# Altium PCB PCB1.PcbDoc
Units mil, origin at the board's own origin, x right, y up, seen from the top; angles counter-clockwise.
Board outline 2755.57 x 2075 mil, 2 copper layers (Top Layer, Bottom Layer); 23 components, 20 nets, 82 pads, 6 vias.
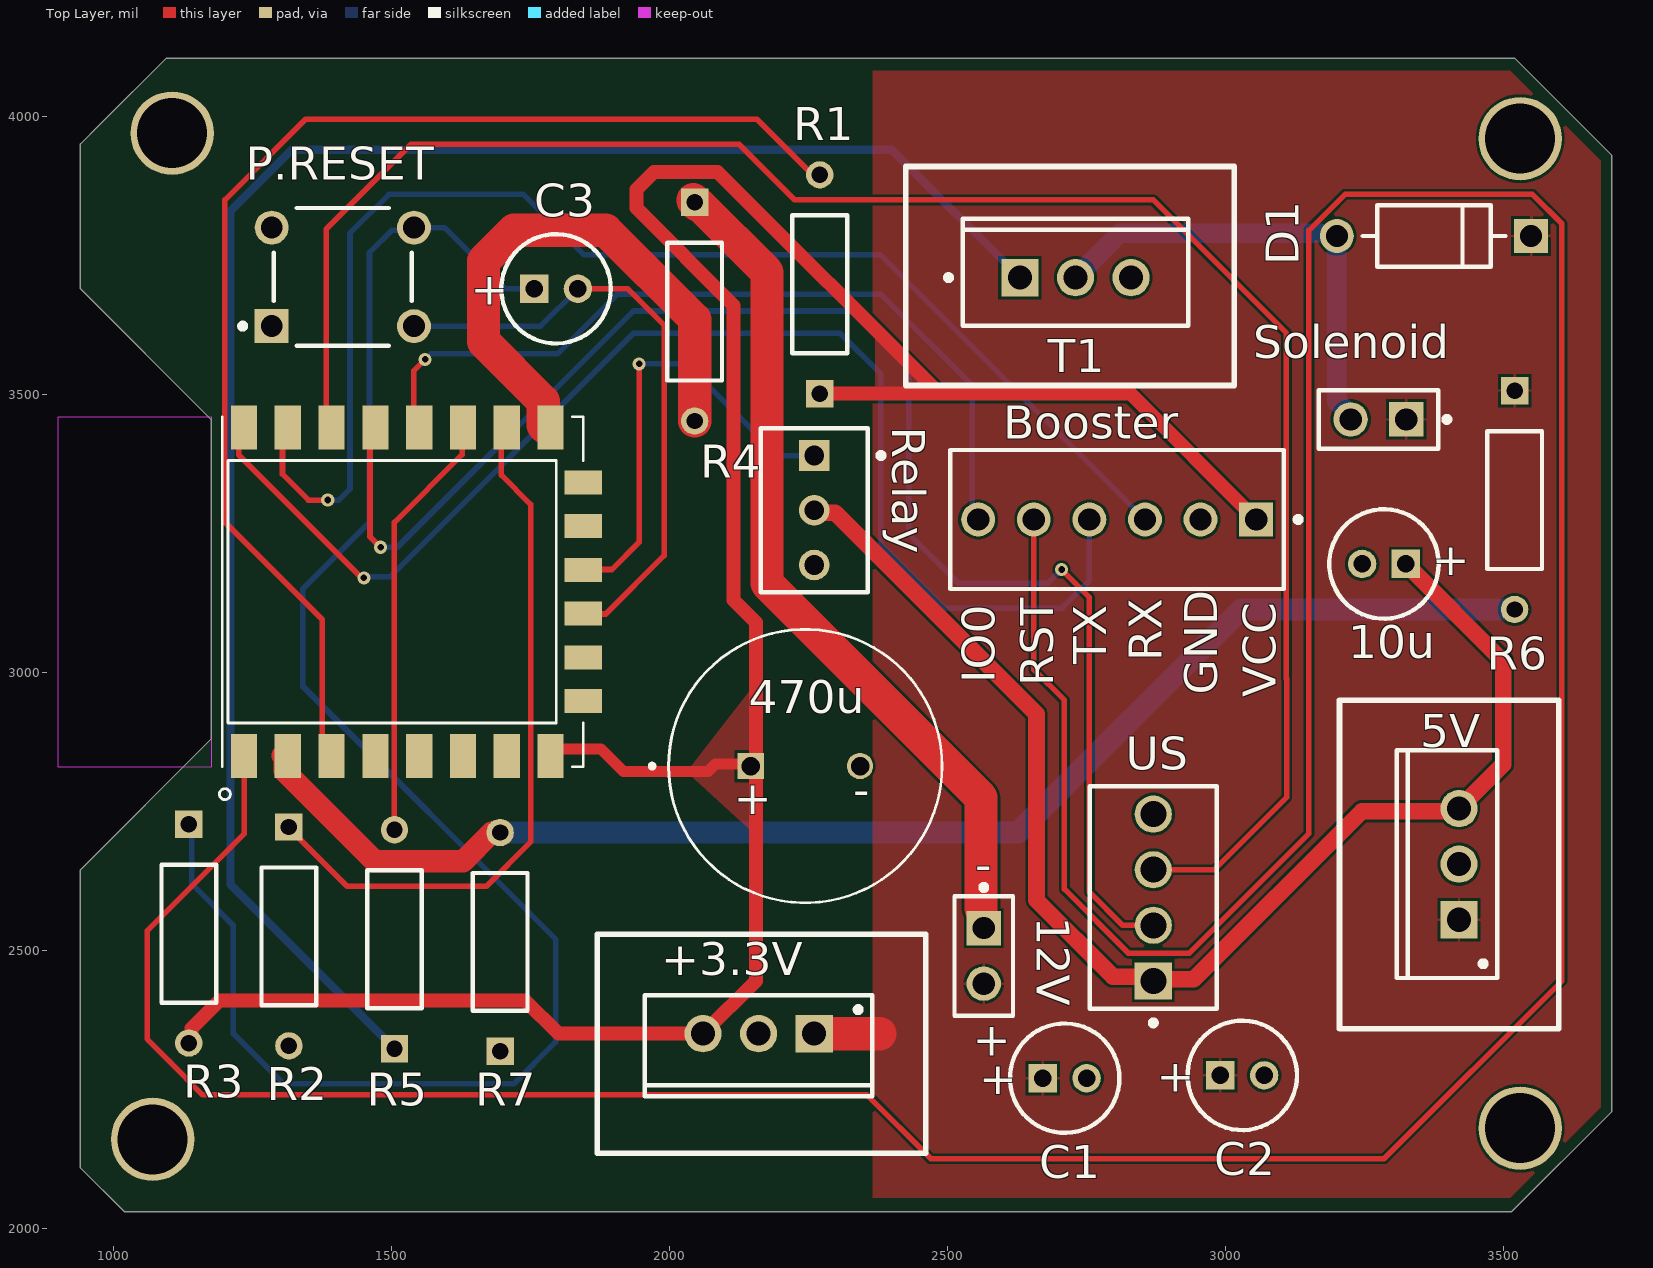
[diagram p0: Top Layer view]
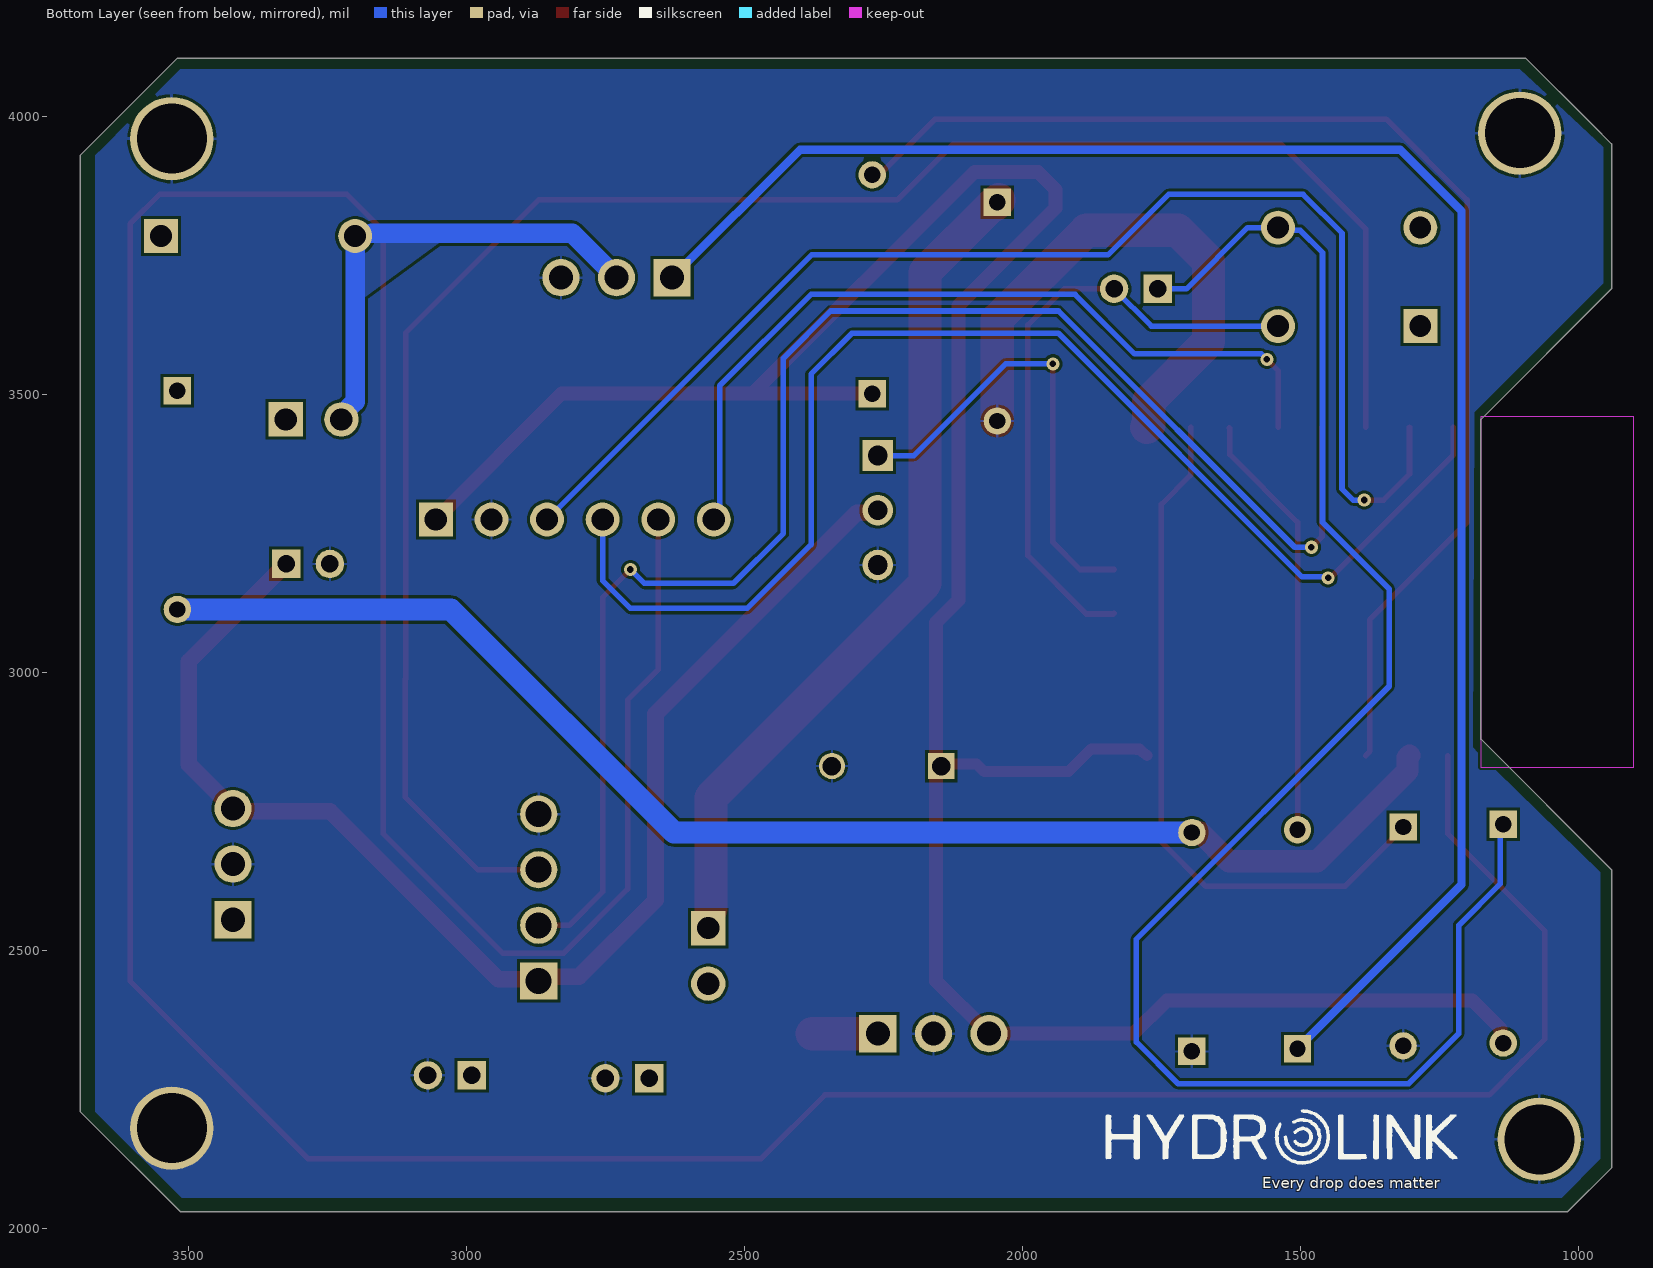
[diagram p1: Bottom Layer view, seen from below]
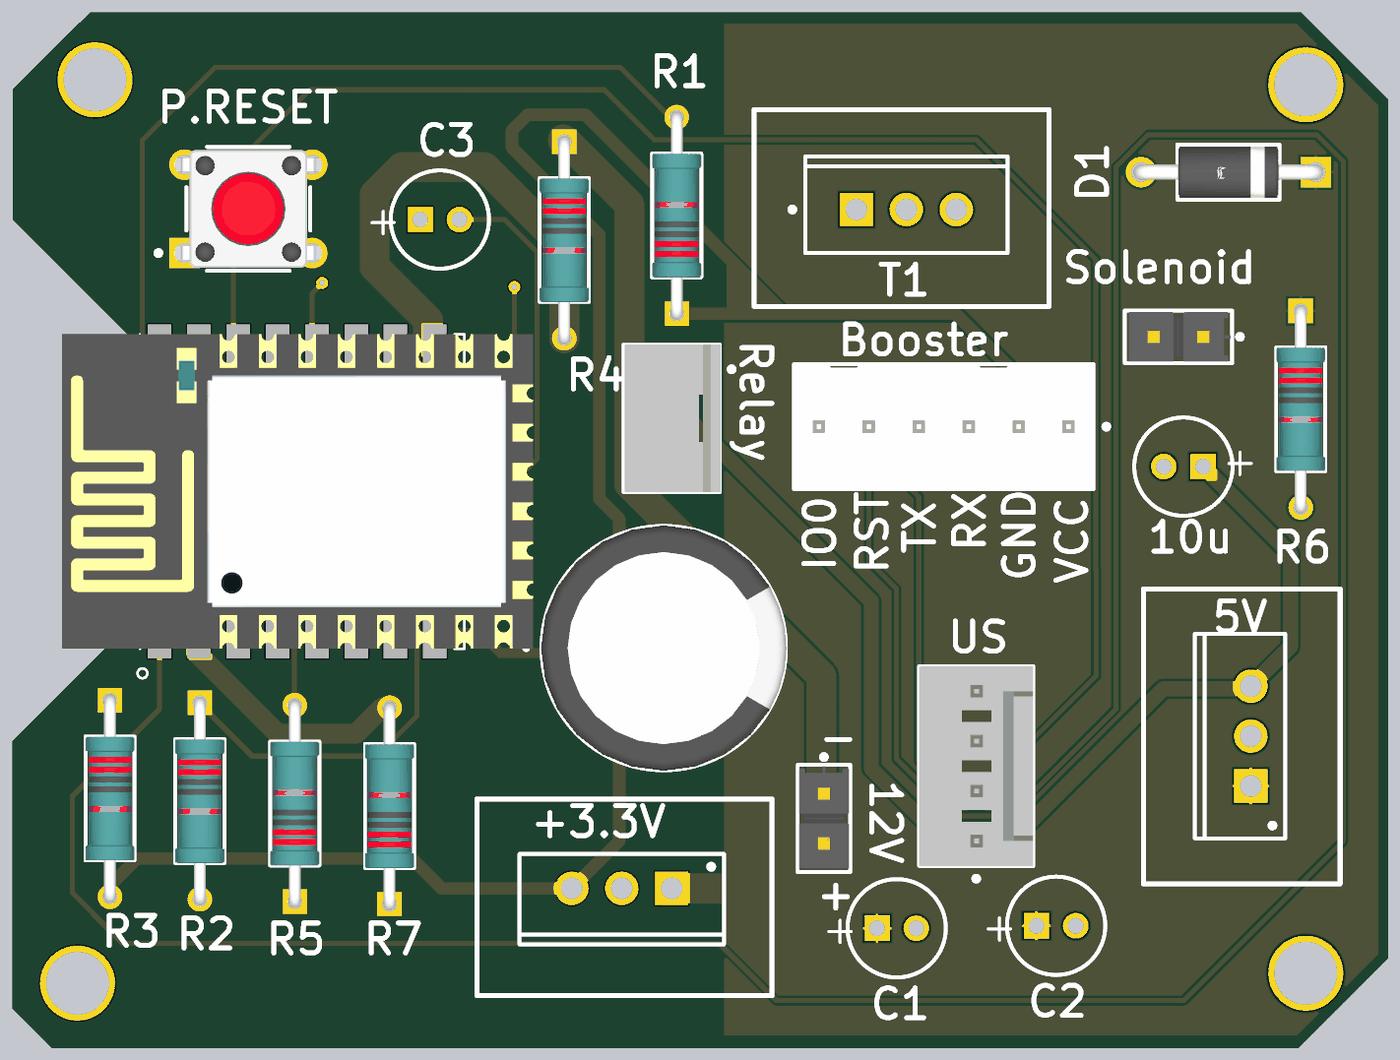
[diagram p2: 3D render of the assembled board from above, using the file's embedded part models]

## Layer stack, top to bottom
Top Solder: solder mask 0.4, Solder Resist, Dk 3.5
Top Layer: signal copper 1.4
Dielectric 1: dielectric 12.6, FR-4, Dk 4.8
Bottom Layer: signal copper 1.4
Bottom Solder: solder mask 0.4, Solder Resist, Dk 3.5

## Board outline
939.59,2645 940,2645 1175,2880 1175,3455 939.92,3690 940,3950.58 974.79,3985.38 1095,4105 3520,4105 3695,3930 3695,2210 3515,2030 1018.85,2030 939.43,2109.43

## Design rules (kind name [scope] priority, off if disabled: settings)
BoardOutlineClearance [All] p1: gap=7.87 ignorepadtopadclearanceinfootprint=FALSE
Clearance [All] p1: gap=5 ignorepadtopadclearanceinfootprint=FALSE except(9.84: Arc-Hole Track-Hole SMDPad-Hole THPad-Hole Via-Hole Fill-Hole Poly-Hole Region-Hole Text-Hole)
ComponentClearance [All] p1: gap=5 collisioncheckmode=3 verticalgap=5 showdistances=TRUE
DiffPairsRouting [All] p1: maxlimit=10 minlimit=5 mostfreqgap=5 toplayer_minwidth=5 toplayer_maxwidth=1000 toplayer_prefwidth=5 bottomlayer_minwidth=5 bottomlayer_maxwidth=1000 bottomlayer_prefwidth=5 maxuncoupledlength=500
Height [All] p1: minheight=0 maxheight=71497.94 prefheight=500
HoleSize [All] p1: absolutevalues=TRUE maxlimit=248.03 minlimit=11.81 maxpercent=80.000 minpercent=20.000
HoleToHoleClearance [All] p1: gap=9.84 allowstackedmicrovias=FALSE
MinimumAnnularRing [All] p1: minimumring=3
MinimumSolderMaskSliver [All] p1: minsoldermaskwidth=0
PlaneClearance [All] p1: clearance=5
PlaneConnect PlaneConnectPowerPads [InPadClass('PowerPads')] p1: planeconnectstyle=Direct reliefexpansion=20 reliefentries=4 reliefconductorwidth=10 reliefairgap=10
PlaneConnect [All] p2: pad.planeconnectstyle=Relief pad.reliefexpansion=11.81 pad.reliefentries=4 pad.reliefconductorwidth=5 pad.reliefairgap=5 via.planeconnectstyle=Direct via.reliefexpansion=11.81 via.reliefentries=4 via.reliefconductorwidth=5 via.reliefairgap=5
PolygonConnect PolygonConnectPowerPads [All vs (InPadClass('PowerPads'))] p1: connectstyle=Direct reliefconductorwidth=10 reliefentries=4 polygonreliefangle="90 Angle" airgapwidth=10
PolygonConnect [All] p2: thpad.connectstyle=Relief thpad.reliefconductorwidth=5 thpad.reliefentries=4 thpad.polygonreliefangle="90 Angle" thpad.airgapwidth=5 smdpad.connectstyle=Relief smdpad.reliefconductorwidth=5 smdpad.reliefentries=4 smdpad.polygonreliefangle="90 Angle" smdpad.airgapwidth=5 via.connectstyle=Direct via.reliefconductorwidth=5 via.reliefentries=4 via.polygonreliefangle="90 Angle" via.airgapwidth=5
RoutingVias [All] p1: holewidth=11.81 width=23.62 viastyle="Through Hole" minholewidth=11.81 minwidth=23.62 maxholewidth=23.62 maxwidth=259.84
SilkToSilkClearance [All] p1: silktosilkclearance=0
SilkToSolderMaskClearance [IsPad] p1: minsilkscreentomaskgap=5 clearancetoexposedcopper=TRUE
SolderMaskExpansion [All] p1: expansion=2.95 istentingtop=FALSE
Width [All] p1: maxlimit=1000 minlimit=5 preferedwidth=5 minimp=50.000000 maximp=50.000000 favimp=50.000000
20 further rules are at their usual default settings.

## Classes and differential pairs
component class "Hydro Line": 5V 10u 12V 470u +3.3V C1 C2 C3 D1 P.RESET R1 R2 R3 R4 R5 R7 Relay Solenoid T1

## Components (designator, comment, footprint, x,y, rotation, side; value= is the part's Value field where it differs from the comment)
5V "L7805CV" TO220 3420,2655 r90 top
10u "ECA1HM220" CAPPR55-200-1100X500X1200 3285,3195 r180 top
12V "TSW-102-07-L-S" FP-TSW-102-07-L-S-MFG 2565,2490 r270 top
470u "EEUTP1V471" CAPPRD500W60D1250H2000 2244.07,2831.38 r0 top
+3.3V "BA033T" TO220 2160,2350 r180 top
Booster "22-23-2061" MOLX-22-23-2061_V 2805,3275 r180 top
C1 "ECA1HM220" CAPPR55-200-1100X500X1200 2710.63,2270 r0 top
C2 "ECA1HM220" CAPPR55-200-1100X500X1200 3030,2275 r0 top
C3 "ECA1HM220" CAPPR55-200-1100X500X1200 1795.63,3690 r0 top
D1 "1N4007" FP-1N4007-MFG 3375,3785 r180 top value=15pF
P.RESET "EVQ-PAG05R" FP-EVQ-PAG05R-MFG 1412.05,3711.42 r90 top
R1 "" FP-MBB0207-MFG 2270,3698.15 r90 top
R2 "" FP-MBB0207-MFG 1315,2525 r270 top
R3 "" FP-MBB0207-MFG 1135,2530 r270 top
R4 "" FP-MBB0207-MFG 2045,3649 r270 top
R5 "" FP-MBB0207-MFG 1505,2520 r90 top
R6 "" FP-MBB0207-MFG 3520,3310 r270 top
R7 "" FP-MBB0207-MFG 1695,2515 r90 top
Relay "171825-3" TECO-171825-3_V 2260,3291.57 r270 top
Solenoid "TSW-102-07-L-S" FP-TSW-102-07-L-S-MFG 3275,3455 r180 top
T1 "TIP120" ONSC-TO-220-3-221A-09 2730,3710 r90 top
US "22-27-2041" MOLX-22-27-2041_V 2870,2595 r270 top
? "ESP8266-12E/ESP-12E" XCVR_ESP8266-12E/ESP-12E 1510,3145 r90 top

## Footprints (in the part's own frame and the unit in brackets; to place one, negate y for a bottom-side part, rotate by r counter-clockwise, add the part's x,y. Pads: shape width x height; smd on the part's side, far side on the other; paste and mask are expansions set on the pad)
CAPPR55-200-1100X500X1200 [mm] "THD, 2-Leads, Dia 5mm, Body Length 11mm"
  rect 1.3x1.3 hole 0.8: 1(-1,0)
  round 1.3 hole 0.8: 2(1,0)
  silkscreen extent -2.5,-2.5 2.5,2.5, body extent -2.5,-2.5 2.5,2.5, height 12
CAPPRD500W60D1250H2000 [mm]
  round 1.2 hole 0.85: N(2.5,0)
  rect 1.2x1.2 hole 0.85: P(-2.5,0)
  silkscreen extent -7.1,-6.25 6.25,6.25, body extent -6.25,-6.25 6.25,6.25, height 20
FP-1N4007-MFG [mm]
  rect 1.55x1.55 hole 1 paste-1000 mask+0: 1(-4.44,0)
  round 1.55 hole 1 paste-1000 mask+0: 2(4.44,0)
  silkscreen extent -3.27,-1.4 3.27,1.4, body extent -5.32,-1.5 5.32,1.5, height 0.25
FP-EVQ-PAG05R-MFG [mm]
  rect 1.55x1.55 hole 1 paste-1000 mask+0: A(-2.25,3.25)
  round 1.55 hole 1 paste-1000 mask+0: A'(-2.25,-3.25) B(2.25,3.25) B'(2.25,-3.25)
  silkscreen extent -3.15,-3.15 3.15,4.7, body extent -3.25,-4.13 3.25,4.13, height 0.25
FP-MBB0207-MFG [mm]
  rect 1.25x1.25 hole 0.75 paste-1000 mask+0: 1(-5,0)
  round 1.25 hole 0.75 paste-1000 mask+0: 2(5,0)
  silkscreen extent -3.15,-1.25 3.15,1.25, body extent -5.72,-1.35 5.72,1.35, height 0.25
FP-TSW-102-07-L-S-MFG [mm]
  rect 1.57x1.57 hole 1.02 paste-1000 mask+0: 1(-1.27,0)
  round 1.57 hole 1.02 paste-1000 mask+0: 2(1.27,0)
  silkscreen extent -3.25,-1.34 2.73,1.34, body extent -2.83,-1.44 2.83,1.44, height 0.25
MOLX-22-23-2061_V [mm] "THD, 6-Leads, Body 15.24x6.35mm, Pitch 2.54mm"
  rect 1.55x1.55 hole 1.02: 1(-6.35,0)
  round 1.55 hole 1.02: 2(-3.81,0) 3(-1.27,0) 4(1.27,0) 5(3.81,0) 6(6.35,0)
  silkscreen extent -8.4,-3.18 7.62,3.18, body extent -7.54,-3.25 7.54,3.1, height 10.67
MOLX-22-27-2041_V [mm] "CONN, 4-Leads, Body 10.16x5.8mm, Pitch 2.54mm"
  rect 1.7x1.7 hole 1.19: 1(3.81,0)
  round 1.7 hole 1.19: 2(1.27,0) 3(-1.27,0) 4(-3.81,0)
  silkscreen extent -5.08,-2.9 5.85,2.9, body extent -5.08,-2.9 5.08,2.9, height 11.7
ONSC-TO-220-3-221A-09 [mm] "FM, 3-Leads, Body 10.3x4.85mm, Pitch 2.54mm"
  rect 1.7x1.7 hole 1.1: 1(0,2.54)
  round 1.7 hole 1.1: 2(0,0) 3(0,-2.54)
  silkscreen extent -2.2,-5.15 2.69,5.92, body extent -2.18,-5.15 2.67,5.15, height 19.85
TECO-171825-3_V [mm] "Connector, 3-Leads, Body 4.9x7.5mm, Pitch 2.5mm"
  rect 1.4x1.4 hole 0.9: 1(-2.5,0)
  round 1.4 hole 0.9: 2(0,0) 3(2.5,0)
  silkscreen extent -3.75,-2.45 3.75,3.17, body extent -3.75,-2.4 3.75,2.5, height 10.4
TO220 [mm] "TO, Thru-Hole, Vertical, Heatsink Mounted; 3 In-Line Leads; Pitch 2.54 mm"
  rect 1.7x1.7 hole 1.1: 1(-2.54,0)
  round 1.7 hole 1.1: 2(0,0) 3(2.54,0)
  silkscreen extent -5.2,-1.75 5.2,2.85, body extent -5.25,-1.8 5.25,2.9, height 19.7
XCVR_ESP8266-12E/ESP-12E [mm]
  rect 2x1.2 smd: 1(-7.5,7) 2(-7.5,5) 3(-7.5,3) 4(-7.5,1) 5(-7.5,-1) 6(-7.5,-3) 7(-7.5,-5) 8(-7.5,-7) 15(7.5,-7) 16(7.5,-5) 17(7.5,-3) 18(7.5,-1) 19(7.5,1) 20(7.5,3) 21(7.5,5) 22(7.5,7)
  rect 1.1x1.7 smd: 9(-5,-8.5) 10(-3,-8.5) 11(-1,-8.5) 12(1,-8.5) 13(3,-8.5) 14(5,-8.5)
  Keep-Out Layer region: 8,8.51 -8.009,8.51 -8.009,15.5 8,15.5
  Keep-Out Layer region: 8,8.51 -8.009,8.51 -8.009,15.5 8,15.5
  silkscreen extent -9.5,-8.5 8,8.12, body extent -8,-12 8,12, height 3

## Part data
5V +3.3V: library part CMP-0244-00483-1, "Positive Voltage Regulator, 5V, 3-Pin TO-220", ComponentLink1Description="Manufacturer URL", ComponentLink1URL=http://www.st.com, ComponentLink2Description=Datasheet, ComponentLink2URL=http://www.st.com/internet/com/TECHNICAL_RESOURCES/TECHNICAL_LITERATURE/DATASHEET/CD00000444.pdf, ComponentLink3Description="Package Specification", ComponentLink3URL=http://www.st.com/internet/com/TECHNICAL_RESOURCES/TECHNICAL_LITERATURE/PACKAGE_INFORMATION/CD00004649.pdf, DatasheetVersion=16/11/2011, PackageDescription="TO, Thru-Hole, Vertical, Heatsink Mounted; 3 In-Line Leads; Pitch 2.54 mm", PackageReference=TO220, PackageVersion=ver3.0
10u C1 C2 C3: library part CMP-1665-00036-2, "Aluminum Electrolytic Capacitor, 22 uF, +/- 20%, 50 V, -40 to 85 degC, 2-Pin THD, RoHS, Bulk", Capacitance=22uF, Case/Package=Radial, Leakage Current=3uA, Manufacturer=Panasonic, Max Operating Temperature=85degC, Min Operating Temperature=-40degC, Package Description="2-Pin Radial Lead, Dia 5 mm, Height 12 mm", Package Quantity=200, Package Reference=CAPPR55-200-1100X500X1200, Ripple Current=100mA, Tolerance=20%, Voltage=50V, Datasheet URL=https://industrial.panasonic.com/cdbs/www-data/pdf/RDF0000/ABA0000C1218.pdf, Datasheet Version="Rev. 05, 10/2016", Diameter=5mm, Dissipation Factor=0.12%, Height=11mm, Height - Seated (Max)=0.472inch, Lead Diameter=0.5mm, Lead Pitch=2mm, Lead/Base Style=Straight, Length=11mm, Life (Hours)=2000Hour, Manufacturer URL=http://www.panasonic.com/, Mount=ThroughHole, Packaging=Bulk, Radiation Hardening=No, REACH SVHC=NoSVHC, Ripple Current (AC)=100mA, RoHSCompliant=true, Termination=Radial, Voltage Rating=50V, Voltage Rating (DC)=50V
12V Solenoid: library part CMP-02766-001428-1, "CONN HEADER VERT 2POS 2.54MM", Color=Black, Current Rating=7.6A, Max Operating Temperature=125°C, Max Voltage Rating (AC)=550V, Min Operating Temperature=-55°C, Package Quantity=1, Connector Type="Male Pin", Contact Material=Bronze, Contact Mating Length=0.23inch, Contact Plating=Gold, Contact Type="Male Pin", Depth=2.54mm, Gender=Male, Housing Color=Black, Housing Material=Polyester, Lead Free="Lead Free", Length=5.08mm, Max Current Rating=7.6A, Mount="Through Hole", Number of Contacts=2, Number of Positions=2, Number of Rows=1, Orientation=Straight, Packaging=Bulk, Pitch=2.54mm, Radiation Hardening=No, REACH SVHC="No SVHC", RoHS Compliant=Yes, Series=TSW, Termination=Solder, Voltage Rating=550V, Width=2.54mm
470u: "CAP ALUM 470UF 20% 35V RADIAL", Package="RADIAL-2 Panasonic", Availability="In Stock", Check_prices=https://www.snapeda.com/parts/EEU-TP1V471/Panasonic/view-part/2304886/?ref=eda, MF=Panasonic, MP=EEU-TP1V471, Price=None, SnapEDA_Link=https://www.snapeda.com/parts/EEU-TP1V471/Panasonic/view-part/2304886/?ref=snap
Booster: library part CMP-2000-05536-1, "Male Header, Pitch 2.54 mm, 1 x 6 Position, Height 10.67 mm, Tail Length 3.56 mm, 0 to 70 degC, RoHS, Bulk", Current Rating=4A, Manufacturer=Molex, Package Description="Male Header, Pitch 2.54 mm, 1 x 6 Position, Height 10.67 mm, Tail Length 3.56 mm", Voltage Rating=250V, Brand=Molex, Contact Material=Brass, Contact Plating=Tin, Datasheet URL=https://datasheet.ciiva.com/19460/232303-19460895.pdf, Datasheet Version="Rev. P, 09/2001", Factory Pack Quantity=1000, Housing Material=Nylon, Manufacturer URL=http://www.molex.com/, Mounting Angle=Vertical, Mounting Style=ThroughHole, Mounting Technology=ThroughHole, Number of Positions=6, Number of Positions / Contacts=6, Number of Rows=1, Package Reference=22-23-2061, Packaging=Bulk, Pitch=2.54mm, Product Category=.100K.K.Connectors, Product Type=Headers, RoHS=Details, Series=6373, Termination Style=ThroughHole, Tradename=KK, Type=PinStrip
D1: library part CMP-123542-000001-1, "Rectifier diode 1000 V 1 A DO-41, ,", Capacitance=15pF, Forward Current=1A, Manufacturer=Diotec, Max Junction Temp=+175°C, Max Repetitive Reverse Voltage=1000V, Max Surge Forward Current=27A, Peak Reverse Current=5uA, Temperature="-50°C to +175°C", Temperature Range Low=-50°C, Automotive=No, Category=Diode, ComponentLink2Description=Datasheet, ComponentLink2URL=https://datasheet.octopart.com/1N4007-Diotec-datasheet-62346875.pdf, Device Class L1="Discrete Semiconductors", Device Class L2=Diodes, Device Class L3="Rectifier Diodes", Height=2.8mm, Ipc Land Pattern Name=DIOAD888W100L520D280, Lead Free=Yes, Manufacturer Part Number=1N4007, Octopart=https://octopart.com/1n4007-diotec-4040411, Package=1N4007, Reverse Voltage=1000V, RoHS=TRUE, Temperature Range High=+175°C
P.RESET: library part CMP-05618-000039-1, "SWITCH TACTILE SPST-NO 0.02A 15V", Actuator Color=Red, Contact Current Rating=20mA, Contact Resistance=50mR, Max Operating Temperature=70°C, Max Voltage Rating (DC)=15V, Min Operating Temperature=-20°C, Operating Force=2.6N, Package Quantity=500, Actuator Length=1.6mm, Actuator Type=Standard, Contact Plating=Silver, Current Rating=20mA, Depth=6.5mm, Electrical Life=50000Cycles, Height=5mm, Illumination Type=Non-Illuminated, Lead Free="Lead Free", Length=6mm, Max Current Rating=20mA, Mechanical Life=50000Cycles, Mount="Through Hole", Orientation=Straight, Packaging=Bulk, Radiation Hardening=No, REACH SVHC="No SVHC", RoHS Compliant=Yes, Series=EVQPA, Size=6mm, Switch Function=Off-Mom, Switch Travel=0.25mm, Termination="PC Pin", Throw Configuration=SPST, Voltage Rating (DC)=15V, Width=6mm
R1 R2 R3 R4 R5 R6 R7: library part CMP-02408-000035-1, "RES 10K OHM 0.6W 1% AXIAL", Case/Package=Conformal, Max Operating Temperature=155°C, Max Power Dissipation=600mW, Min Operating Temperature=-55°C, Resistance=10kR, Resistance Tolerance=1%, Resistor Type="Metal Film", Temperature Coefficient=50ppm/°C, Voltage Rating=300V, Construction=Cylindrical, Contact Plating=Tin, Diameter=2.5mm, Features="Automotive AEC-Q200", Lead Free="Lead Free", Length=6.5mm, Military Standard=Not, Number of Terminations=2, Packaging="Tape and Reel", Power Rating=600mW, Radiation Hardening=No, RoHS Compliant=Yes, Series="MBB 0207 - Professional", Technology="THIN FILM", Termination=Axial, Tolerance=1%, Voltage Rating (DC)=300V
Relay: library part CMP-2000-07494-1, "Male Header, Pitch 2.5 mm, 1 x 3 Position, Height 10.4 mm, Tail Length 3.6 mm,  / -20 to 95 degC / , RoHS, Bulk", Colour=Natural, Contact Resistance=20mOhm, Flammability Rating=UL94V-0, Manufacturer="TE Connectivity", Max Current Rating=3.5A, Max Operating Temperature=95degC, Max Voltage Rating (AC)=250V, Max Voltage Rating (DC)=350.25kV, Min Operating Temperature=-20degC, Package Description="Male Header, Pitch 2.5 mm, 1 x 3 Position, Height 10.4 mm, Tail Length 3.6 mm", Package Quantity=1000, Voltage Rating=350V, Approvals=UL, Backwall/Post Interruptions=No(Without), Connector Type=Header, Contact Gender=Male, Contact Material=Brass, Contact Mating Length=0.295inch, Contact Plating=Tin, Contact Retention=No(Without), Contact Shape=Square, Datasheet URL=http://www.te.com/commerce/DocumentDelivery/DDEController?Action=showdoc&DocId=Customer+Drawing%7F171825%7FY3%7Fpdf%7FEnglish%7FENG_CD_171825_Y3.pdf%7F171825-3, Datasheet Version="Rev. Y3, 12/2016", Depth=4.9mm, Height=0.409inch, Housing Colour=Natural, Housing Material=Nylon, Length=7.5mm, Manufacturer URL=http://www.te.com/, Mating Alignment=Yes(With), Mating Post Length=7.5mm, Mating Retention=Yes(With), Mount=ThroughHole, Mounting Technology=ThroughHole, Number of Contacts=3, Number of Positions=3, Number of Rows=1, Orientation=Straight, Package Reference=171825-3, Packaging=Bag, Panel Mount Retention=No(Without), PCB Mount Alignment=No(Without), PCB Mount Retention=Without, PCB Mounting Orientation=Vertical, PCB Thickness=0.063inch, Pitch=2.5mm, Plating Thickness=0.8um, REACH SVHC=NoSVHC, RoHSCompliant=True, Strain Relief=No(Without), Tail Length=0.142inch, Termination=Solder
T1: library part CMP-1047-00140-1, "Plastic Medium-Power, Complementary Silicon Transistor, 3-Pin TO-220, Tube", Manufacturer="On Semiconductor", ComponentLink1Description="Manufacturer URL", ComponentLink1URL=http://www.onsemi.com/, ComponentLink2Description=Datasheet, ComponentLink2URL=http://www.onsemi.cn/pub_link/Collateral/TIP120-D.PDF, ComponentLink3Description="Package Specification", ComponentLink3URL=http://www.onsemi.com/pub_link/Collateral/221A-09.PDF, DatasheetVersion="Rev. 8", IC Continuous (A)=5, Mounting Technology="Through Hole", PackageDescription="3-Pin Flange Mount, Vertical Straight Lead, Body 9.97 x 4.445 mm, Pitch 2.54 mm", PackageReference=TO-220-3-221A-09, PackageVersion="Rev. AG, 09/2011", Packing=Tube, PartNumber=TIP120, Polarity=NPN, RoHS=FALSE
US: library part CMP-2000-05243-1, "Male Header, Pitch 2.54 mm, 1 x 4 Position, Height 11.7 mm, Tail Length 3.56 mm, RoHS, Bulk", Current Rating=4A, Manufacturer=Molex, Operating temperature=0degCto+75degC, Voltage Rating=250V, Contact Material=Tinplatedbrass, Datasheet URL=http://www.molex.com/pdm_docs/sd/022272041_sd.pdf, Datasheet Version="Rev. F, 06/2009", Housing Material=Nylon(UL94V-0), Manufacturer URL=http://www.molex.com/
?: "This WiFi module has a 32-bit MCU micro and clock speeds supporting 80 MHz or 160 MHz. Supports the RTOS and integrated Wi-Fi MAC/BB/RF/PA/LNA, and has an on-board antenna.", Package=None, Availability="Not in stock", Check_prices=https://www.snapeda.com/parts/ESP8266-12E/ESP-12E/AI-Thinker/view-part/?ref=eda, MF=AI-Thinker, MP=ESP8266-12E/ESP-12E, Price=None, SnapEDA_Link=https://www.snapeda.com/parts/ESP8266-12E/ESP-12E/AI-Thinker/view-part/?ref=snap

## Free pads (board coordinates)
  round 150 hole 125.98: 2(1105,3970) 3(3530,3960) 4(3530,2180) 5(1070,2160)

## Via types
v1: diameter 23.62, hole 11.81, Top Layer to Bottom Layer, 6 vias

## Nets (pads, with @x,y where several pads share a name; then routed paths per layer and width w, separated by ;. In a path a pad name is that pad's centre, name@x,y a point inside that pad or via, vN(x,y) a via of type N, cw(c..) or ccw(c..) an arc to the next point about the centre after c; other vN are vias at no path point)
+5V: 5V.3 10u.1 Relay.2 US.1 | length 2402.4
  Top Layer w30: Relay.2@2248.4,3290 2251.42,3286.98 2298.02,3286.98 2660,2925 2660,2590 2797.3,2452.7 2854.3,2452.7 2870,2437 2880.7,2447.7 2942.7,2447.7 3245,2750 3405,2750 5V.3@3420,2765 ; 10u.1 3499.37,3020 3499.37,2834.37 5V.3
+12V: 5V.1 12V.2 +3.3V.1 C1.1 C2.1 D1.1 R6.1 Solenoid.1 | length 117.7
  Top Layer w60: +3.3V.1 2377.7,2350
ADC: ?.2 R6.2 R7.2 | length 2494.5
  Top Layer w40: ?.2@1303.5,2850.35 1307.13,2846.73 1307.13,2822.87 1470,2660 1628.15,2660 1680,2711.85 R7.2
  Bottom Layer w40: R7.2@1697.49,2711.85 2626.85,2711.85 3028.15,3113.15 R6.2
GND: 5V.2 10u.2 470u.N +3.3V.2 ?.15 Booster.2 C1.2 C2.2 pad.2 pad.3 pad.4 pad.5 R2.2 R4.2 R7.1 Relay.3 T1.3 US.4 | length 997
  Top Layer w60: ?.15@1775.94,3440.91 1772.32,3444.53 1772.32,3487.68 1665,3595 1665,3740 1720,3795 1885,3795 2045,3635 R4.2
IO0: ?.18 Booster.6 | length 1476.4
  Top Layer w10: ?.18@1539.72,3440.91 1539.72,3542.72 v1(1560,3563)
  Bottom Layer w10: v1(1560,3563) 1570,3573 1798,3573 1905,3680 2380,3680 2544.28,3515.72 2544.28,3285.72 Booster.6
IO2: ?.17 R5.2 | length 778.9
  Top Layer w10: R5.2@1504.66,2712.46 1504.66,3269.66 1626.76,3391.76 1626.76,3438.93 ?.17
IO4: ?.19 US.2 | length 2763.2
  Top Layer w10: ?.19@1460.98,3440.91 1460.98,3244.02 v1(1480,3225) ; v1(2705,3185) 2755,3135 2755,2605 2815,2545 US.2
  Bottom Layer w10: v1(1480,3225) 1510,3225 1935,3650 2345,3650 2430,3565 2430,3250 2520,3160 2680,3160 v1(2705,3185)
IO5: ?.20 US.3 | length 3418
  Top Layer w10: ?.20@1382.24,3440.91 1382.24,3797.24 1535,3950 2125,3950 2225,3850 2870,3850 3109.5,3610.5 3109.5,2988.5 3110,2989 3110,2775 2980,2645 US.3
IO9: ?.11 C3.2 P.RESET.A' | length 1118.8
  Top Layer w10: ?.11@1835,3106.26 1836.26,3105 1885,3105 1990,3210 1990,3625 1925,3690 C3.2
  Bottom Layer w10: P.RESET.A' 1767.84,3622.84 C3.2
IO10: ?.12 Relay.1 | length 834.6
  Top Layer w10: ?.12@1835,3185 1896,3185 1945,3234 v1(1945,3555)
  Bottom Layer w10: v1(1945,3555) 2030,3555 2195,3390 Relay.1
Net12V_1: 12V.1 R4.1 | length 1492.2
  Top Layer w60: R4.1@2042.5,3850.46 2042.5,3848.35 R4.1 2049.61,3841.24 2053.76,3841.24 2175,3720 2175,3160 2560,2775 2560,2575
Net_3: ?.3 R1.2 | length 2252.1
  Top Layer w10: ?.3@1382.24,2850.35 1375,2857.6 1375,3095 1200,3270 1200,3850 1345,3995 2156.85,3995 2190,3961.85 R1.2@2270,3881.85
Net_16: ?.16 R2.1 | length 1288.2
  Top Layer w10: R2.1@1309.56,2725.44 1311.41,2725.44 1334.61,2702.24 1334.61,2700.39 1420,2615 1670,2615 1750,2695 1750,3302.2 1697.2,3355 ?.16@1697.2,3440.91
NetC3_1: C3.1 P.RESET.B' R3.1 | length 3069.9
  Bottom Layer w10: R3.1@1140,2721.85 1140,2620 1215,2545 1215,2350 1305,2260 1720,2260 1795,2335 1795,2520 1340,2975 1340,3150 1460,3270 1460,3600 1460,3755 1500.35,3795.35 1535.35,3795.35 P.RESET.B' 1595,3800 1705,3690 C3.1
NetD1_2: D1.2 Solenoid.2 T1.2 | length 823.6
  Bottom Layer w35: T1.2 2810,3790 D1.2@3170.2,3790 ; D1.2 3200.2,3487.06 3225,3462.26 Solenoid.2@3225,3445
NetR5_1: R5.1 T1.1 | length 3189.9
  Bottom Layer w15: R5.1 1210,2618.15 1210,3830 1320,3940 2400,3940 T1.1
RST: ?.1 Booster.5 | length 7564
  Top Layer w10: ?.1 1234.41,2709.41 1060,2535 1060,2340.67 1100.39,2300.27 1100.39,2299.61 1160,2240 2355,2240 2470,2125 3285,2125 3605,2445 3605,3807.07 3552.07,3860 3215,3860 3150,3795 3150,2710 2935,2495 2825,2495 2710,2610 2710,2950 2655,3005 Booster.5
RX: ?.21 Booster.3 | length 2394.8
  Top Layer w10: ?.21@1303.5,3440.91 1303.5,3356.5 1350,3310 v1(1385,3310)
  Bottom Layer w10: v1(1385,3310) 1405,3310 1425,3330 1425,3790 1495,3860 1737,3860 1846,3751 2379,3751 Booster.3
TX: ?.22 Booster.4 | length 2369.2
  Top Layer w10: ?.22@1224.76,3440.91 1224.76,3391.24 1443.39,3172.61 1447.39,3172.61 v1(1450,3170)
  Bottom Layer w10: v1(1450,3170) 1451.81,3171.81 1496.81,3171.81 1935,3610 2306.7,3610 2380,3536.7 2380,3230 2495,3115 2705,3115 2755,3165 Booster.4
VCC: 470u.P +3.3V.3 ?.8 Booster.1 R1.1 R3.2 | length 4640.9
  Top Layer w20: ?.8@1775.94,2850.35 1789.57,2861.63 1793.83,2861.63 ccw(c1793.83,2881.47) 1796.87,2861.86 1876.44,2861.86 1916.92,2821.38 2068.72,2821.38 2082.35,2835 2142.03,2835 470u.P
  Top Layer w25: R3.2 1139.63,2337.78 1139.63,2359.63 1190,2410 1740,2410 1800,2350 +3.3V.3 2155,2445 2155,2831.38 2155,3090 2115,3130 2115,3660 1940,3835 1940,3868.28 1971.72,3900 2086.3,3900 2485,3501.3 ; R1.1 2485,3501.3 ; Booster.1 2828.7,3501.3 2485,3501.3
pads on no net: ?.4 ?.5 ?.6 ?.7 ?.9 ?.10 ?.13 ?.14 P.RESET.A P.RESET.B

## Polygon pours and split planes (outlines as drawn)
VCC on Top Layer "NONET_L-01_P-001" (solid, pour order 4): 2365,3615 2370,3610 2370,3505 2459.3,3505 2470.3,3516
+12V on Top Layer "+12V_L01_P001" (solid, pour order 1): 3675,2217.5 3512.5,2055 2365,2055 2365,4082.5 3512.5,4082.5 3675,3920 3675,3562.5
VCC on Top Layer "NONET_L-01_P-001" (solid, pour order 2): 2155.47,2981.38 2155.47,2706.38 2030.47,2821.38 2035.47,2826.38 2030.47,2821.38
GND on Bottom Layer "NONET_L-01_P-001" (solid, pour order 5): 955,3945 1105,4085 3515,4085 3667.5,3930 3667.5,2210 3512.5,2055 1030,2055 950,2135 960,2125 960,2640 1190,2865 1187.5,3467.5 955,3700
NetD1_2 on Bottom Layer "NONET_L-01_P-001" (solid, pour order 3): 3025,3790 3205,3790 3205,3660 3210,3655

## Silkscreen, mask and mechanical layers (free items; w line width, h text height)
Top Overlay:
  lines w10: 1870,2135 2461,2135 2461,2529 1870,2529 1870,2135 ; 2425,3516 3016,3516 3016,3910 2425,3910 2425,3516 ; 3205,2359 3205,2950 3599,2950 3599,2359 3205,2359
  text "RX" at 2885,3020 h60 r90
  text "TX" at 2785,3015 h60 r90
  text "IO0" at 2585,2980 h60 r90
  text "RST" at 2690,2975 h60 r90
  text "GND" at 2985,2960 h60 r90
  text "VCC" at 3090,2955 h60 r90
  text "-" at 2330,2760.01 h60
  text "+" at 2115,2745 h60
  text "-" at 2550,2625.01 h60
  text "+" at 2545,2310 h60
Bottom Overlay:
  drawing of 11 lines, arcs and shapes, not listed
  text "Every drop does matter" at 1568.2,2071.66 h20

## Text inside footprints (layer, text, board x,y; h text height)
10u: Top Overlay "+" at 3438.86,3224.02 h59.06 r180
C1: Top Overlay "+" at 2556.77,2240.98 h59.06
C2: Top Overlay "+" at 2876.14,2245.98 h59.06
C3: Top Overlay "+" at 1641.77,3660.98 h59.06